# EAGLE board COVERsation_v0.35 (EAGLE 7.6.0)
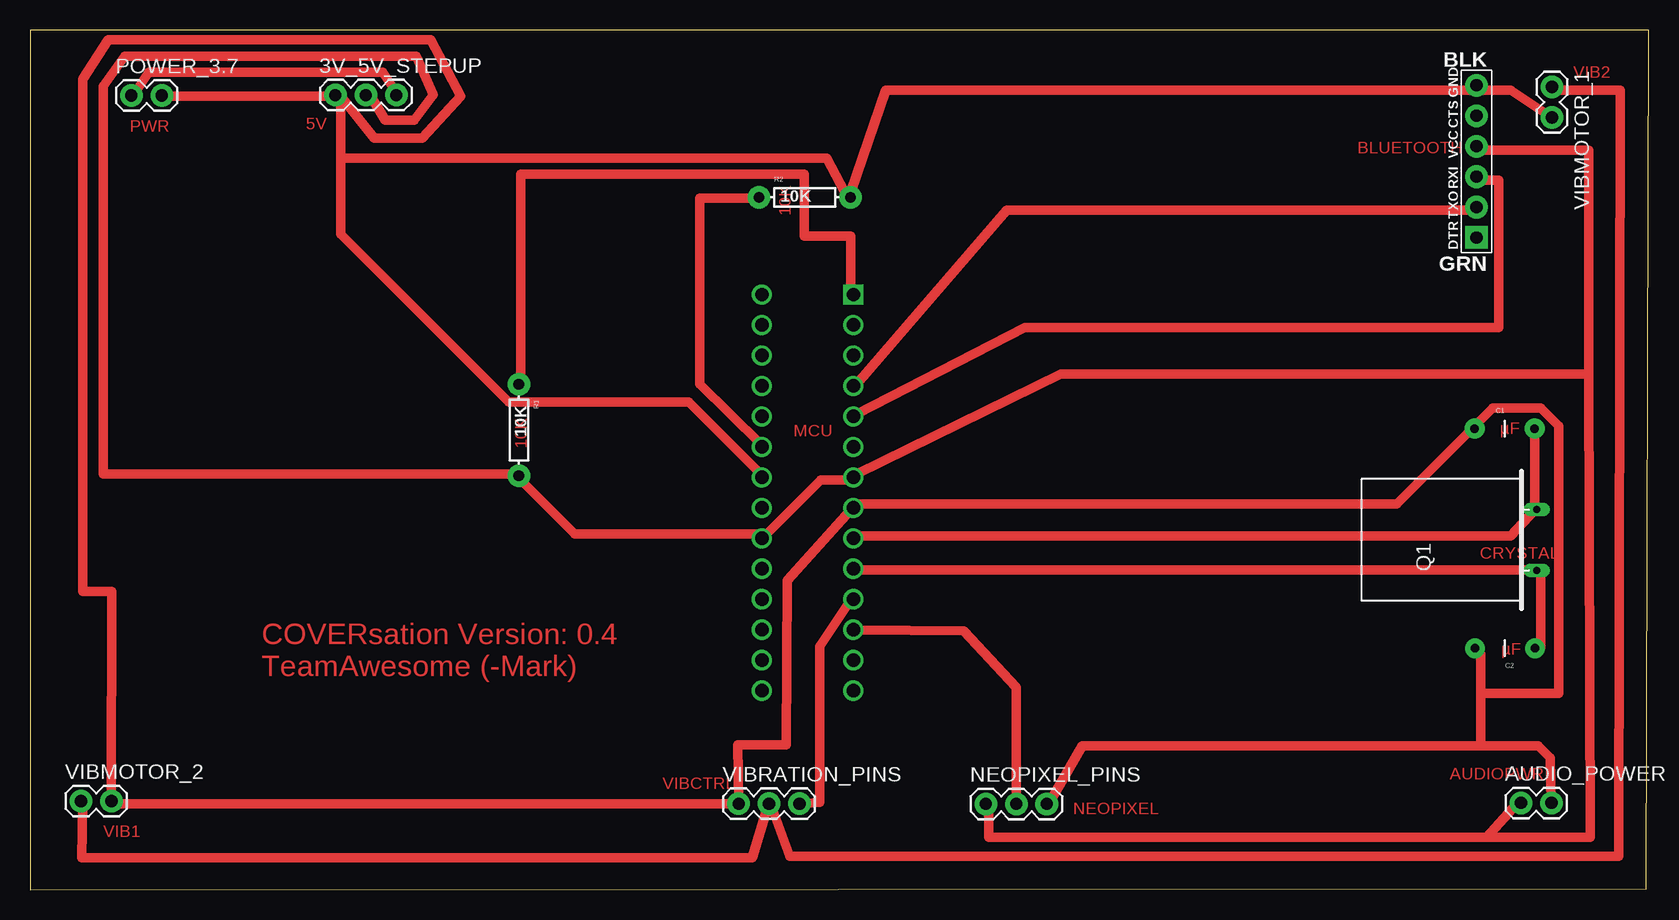
[diagram p0: board, top side]
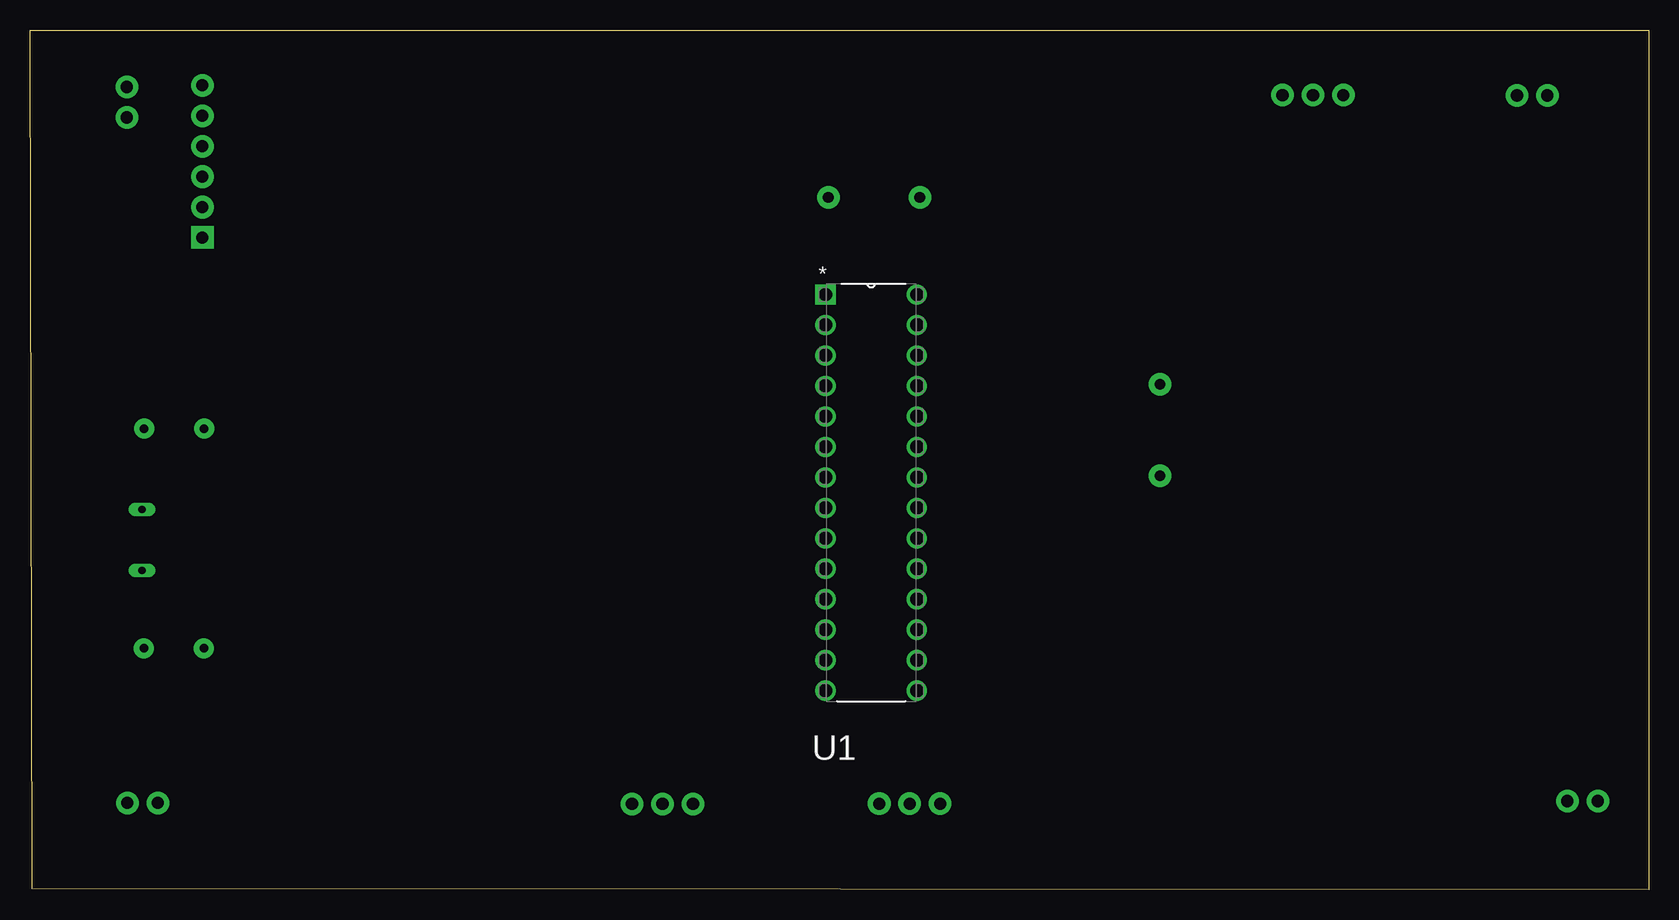
[diagram p1: board, bottom side, seen from below]

Size 134.9 x 71.7 mm. Coordinates in mm from the lower left corner, seen from the top.
Outline: 0,0 134.7,0.1 134.9,71.7 0,71.7 0,0
Copper layers (1*16): Top 0.035mm / dielectric 1.5mm / Bottom 0.035mm
Design rules "default *": minimum track width 10mil, minimum drill 24mil, track to track 12mil, track to pad 12mil, pad to pad 8mil, via to via 8mil, smd to smd 8mil, copper to edge 40mil, drill to drill 8mil, minimum pad ring 10mil, minimum via ring 8mil, stop-mask expansion 8mil, vias tented up to drill 0mil, thermal gap 10mil
Net classes: 0 default: width 0.254 mm, drill 0.254 mm, clearance 0.254 mm; 1 GND: width 0.254 mm, drill 0.254 mm, clearance 0.254 mm; 2 VCC: width 0.254 mm, drill 0.254 mm, clearance 0.254 mm

## Footprints (pad centres in the part's own frame; a part is rotated, then mirrored left to right if it is on the bottom)
1X03 = drill 1.016 pad 1.88: 1 0,0; 2 2.54,0; 3 5.08,0
1X02 = drill 1.016 pad 1.88: 1 0,0; 2 2.54,0
FTDI_DEVICE_SIDE = drill 1.016 pad 1.88 square: P$1 -6.35,0 | drill 1.016 pad 1.88: P$2 -3.81,0; P$3 -1.27,0; P$4 1.27,0; P$5 3.81,0; P$6 6.35,0
CAP-PTH-5MM = drill 0.7 pad 1.651: 1 -2.5,0; 2 2.5,0
Q = drill 0.61 long: 1 -2.54,-7.62; 2 2.54,-7.62
AXIAL-0.3EZ = drill 0.9 pad 1.88: P$1 -3.81,0; P$2 3.81,0
DIP254P762X457-28 = drill 1.118 square: 1 -7.62,33.02 | drill 1.118: 2 -7.62,30.48; 3 -7.62,27.94; 4 -7.62,25.4; 5 -7.62,22.86; 6 -7.62,20.32; 7 -7.62,17.78; 8 -7.62,15.24; 9 -7.62,12.7; 10 -7.62,10.16; 11 -7.62,7.62; 12 -7.62,5.08; 13 -7.62,2.54; 14 -7.62,0; 15 0,0; 16 0,2.54; 17 0,5.08; 18 0,7.62; 19 0,10.16; 20 0,12.7; 21 0,15.24; 22 0,17.78; 23 0,20.32; 24 0,22.86; 25 0,25.4; 26 0,27.94; 27 0,30.48; 28 0,33.02

## Placement (x,y rotation side)
3V_5V_STEPUP  [1X03]  25.45,66.27 0 top
AUDIO_POWER  [1X02]  124.25,7.25 0 top
BLUETOOTH_MATE  FTDI_DEVICE  [FTDI_DEVICE_SIDE]  120.54,60.74 90 top
C1  [CAP-PTH-5MM]  122.89,38.46 0 top
C2  [CAP-PTH-5MM]  122.91,20.15 180 top
NEOPIXEL_PINS  [1X03]  79.65,7.17 0 top
POWER_3.7  [1X02]  8.45,66.24 0 top
Q1  [Q]  117.94,29.18 90 top
R1  10K  [AXIAL-0.3EZ]  40.74,38.34 270 top
R2  10K  [AXIAL-0.3EZ]  64.56,57.75 0 top
U1  ATMEGA328P-PU  [DIP254P762X457-28]  60.99,16.62 0 bottom
VIBMOTOR_1  [1X02]  126.83,66.95 270 top
VIBMOTOR_2  [1X02]  4.25,7.41 0 top
VIBRATION_PINS  [1X03]  59.05,7.19 0 top

## Library data of the parts
3V_5V_STEPUP AUDIO_POWER BLUETOOTH_MATE NEOPIXEL_PINS POWER_3.7 VIBMOTOR_1 VIBMOTOR_2 VIBRATION_PINS = SparkFun-Connectors
C1 C2 = SparkFun-Capacitors
Q1 = special
R1 R2 = SparkFun-Passives
U1 = Atmel_By_element14_Batch_1-00; MPN: ATMEGA328P-PU; OC_FARNELL: 1715487; OC_NEWARK: 15R0268; PACKAGE: PDIP-28; SUPPLIER: Atmel

## Nets
BT_RX: BLUETOOTH_MATE.P$2 U1.4
BT_TX: BLUETOOTH_MATE.P$3 U1.5
FSR_SIG: R2.P$1 U1.23
GND [GND]: 3V_5V_STEPUP.1 AUDIO_POWER.2 BLUETOOTH_MATE.P$6 C1.1 C2.2 NEOPIXEL_PINS.3 POWER_3.7.2 R2.P$2 U1.8 U1.22 VIBMOTOR_1.2 VIBMOTOR_2.2 VIBRATION_PINS.1
N$1: C1.2 Q1.2 U1.9
N$2: C2.1 Q1.1 U1.10
N$3 [VCC]: 3V_5V_STEPUP.3 POWER_3.7.1
N$4: R1.P$1 U1.1
N$5 [VCC]: VIBMOTOR_1.1 VIBMOTOR_2.1 VIBRATION_PINS.2
NEOPIXEL_SIG: NEOPIXEL_PINS.2 U1.12
VCC: 3V_5V_STEPUP.2 AUDIO_POWER.1 BLUETOOTH_MATE.P$4 NEOPIXEL_PINS.1 R1.P$2 U1.7 U1.20
VIB_SIG: U1.11 VIBRATION_PINS.3

## Tracks (layer width: path | path; a pad name or v marks a point on that pad's centre or on a via)
BT_RX
  Top 0.8: U1.4 68.9,42.2 81.4,56.7 120.4,56.7 BLUETOOTH_MATE.P$2
BT_TX
  Top 0.8: U1.5 68.9,39.7 82.9,46.9 122.4,46.9 122.4,59.2 120.9,59.2 BLUETOOTH_MATE.P$3
FSR_SIG
  Top 0.8: U1.23 60.9,37.2 55.8,42.2 55.8,57.7 60.4,57.7 R2.P$1
GND
  Top 0.8: VIBMOTOR_1.2 126.4,64.7 123.4,66.7 120.9,66.7 BLUETOOTH_MATE.P$6 120.4,66.7 71.3,66.7 68.4,58.2 R2.P$2 67.9,58.2 66.4,61 25.9,61 | 25.9,66.2 25.9,61 | 25.9,61 25.9,54.7 39.9,40.7 54.9,40.7 60.9,34.7 U1.22 | POWER_3.7.2 11.4,66.2 25.4,66.2 3V_5V_STEPUP.1 25.9,66.2 | 120.9,12 120.9,16.4 | 120.9,16.4 120.9,19.7 C2.2 | 120.9,12 125.7,12 126.7,11 AUDIO_POWER.2 | 120.9,16.4 127.4,16.4 127.4,38.7 125.9,40.2 121.9,40.2 120.4,38.7 C1.1 119.9,38.2 113.9,32.2 68.9,32.2 U1.8 68.4,31.7 63.1,25.8 63,12.1 59,12.1 VIBRATION_PINS.1 58.9,7.2 6.9,7.2 VIBMOTOR_2.2 6.8,24.9 4.4,24.9 4.4,67.6 6.5,70.9 33.4,70.9 35.9,66.2 32.7,62.7 28.7,62.7 25.9,66.2 | 120.9,12 87.7,12 84.9,7.2 NEOPIXEL_PINS.3
N$1
  Top 0.8: C1.2 125.4,38.2 125.4,32.2 Q1.2 125.4,31.7 123.4,29.5 68.9,29.5 68.9,29.7 U1.9
N$2
  Top 0.8: C2.1 125.9,20.2 125.9,26.2 Q1.1 125.4,26.7 68.9,26.7 U1.10
N$3
  Top 0.8: POWER_3.7.1 8.9,66.7 9.9,68.2 29.4,68.2 30.4,66.7 3V_5V_STEPUP.3
N$4
  Top 0.8: U1.1 68.4,49.7 68.4,54.5 64.5,54.5 64.5,59.7 40.9,59.7 40.9,42.2 R1.P$1
N$5
  Top 0.8: VIBMOTOR_2.1 4.4,7.2 4.3,2.7 60.2,2.7 61.4,6.7 VIBRATION_PINS.2 61.9,6.7 63.3,2.8 132.4,2.8 132.5,66.7 126.9,66.7 VIBMOTOR_1.1
NEOPIXEL_SIG
  Top 0.8: U1.12 68.9,21.7 77.8,21.6 82.2,16.9 NEOPIXEL_PINS.2
VCC
  Top 0.8: 3V_5V_STEPUP.2 28.4,66.2 29.6,64.2 32,64.2 33.6,66.3 32.2,69.5 7.9,69.5 6.1,67 6.1,34.7 40.4,34.7 R1.P$2 40.9,34.2 45.4,29.7 60.9,29.7 U1.20 61.4,29.7 65.9,34.2 68.4,34.2 U1.7 68.9,34.7 85.9,43 129.9,43 | 121.4,4.4 79.9,4.4 79.9,6.7 NEOPIXEL_PINS.1 | 121.4,4.4 123.9,7.2 AUDIO_POWER.1 | 129.9,43 130,4.4 121.4,4.4 | 129.9,43 129.9,61.7 120.9,61.7 BLUETOOTH_MATE.P$4
VIB_SIG
  Top 0.8: U1.11 68.4,24.2 65.8,20.3 65.8,7.3 VIBRATION_PINS.3

## Text on the board
Top: VIB2 | PWR | 5V | BLUETOOTH | 10K | MCU | µF | 10K | CRYSTAL | µF | COVERsation Version: 0.4 / TeamAwesome (-Mark) | AUDIOPWR | VIBCTRL | NEOPIXEL | VIB1